# Altium PCB My_MucLeo_EXT_Board.PcbDoc
Units mil, origin at the board's own origin, x right, y up, seen from the top; angles counter-clockwise.
Board outline 5957.48 x 3757.48 mil, 2 copper layers (Top Layer, Bottom Layer); 18 components, 31 nets, 160 pads, 43 vias.
Unrouted connection lines stored in the file: 9.
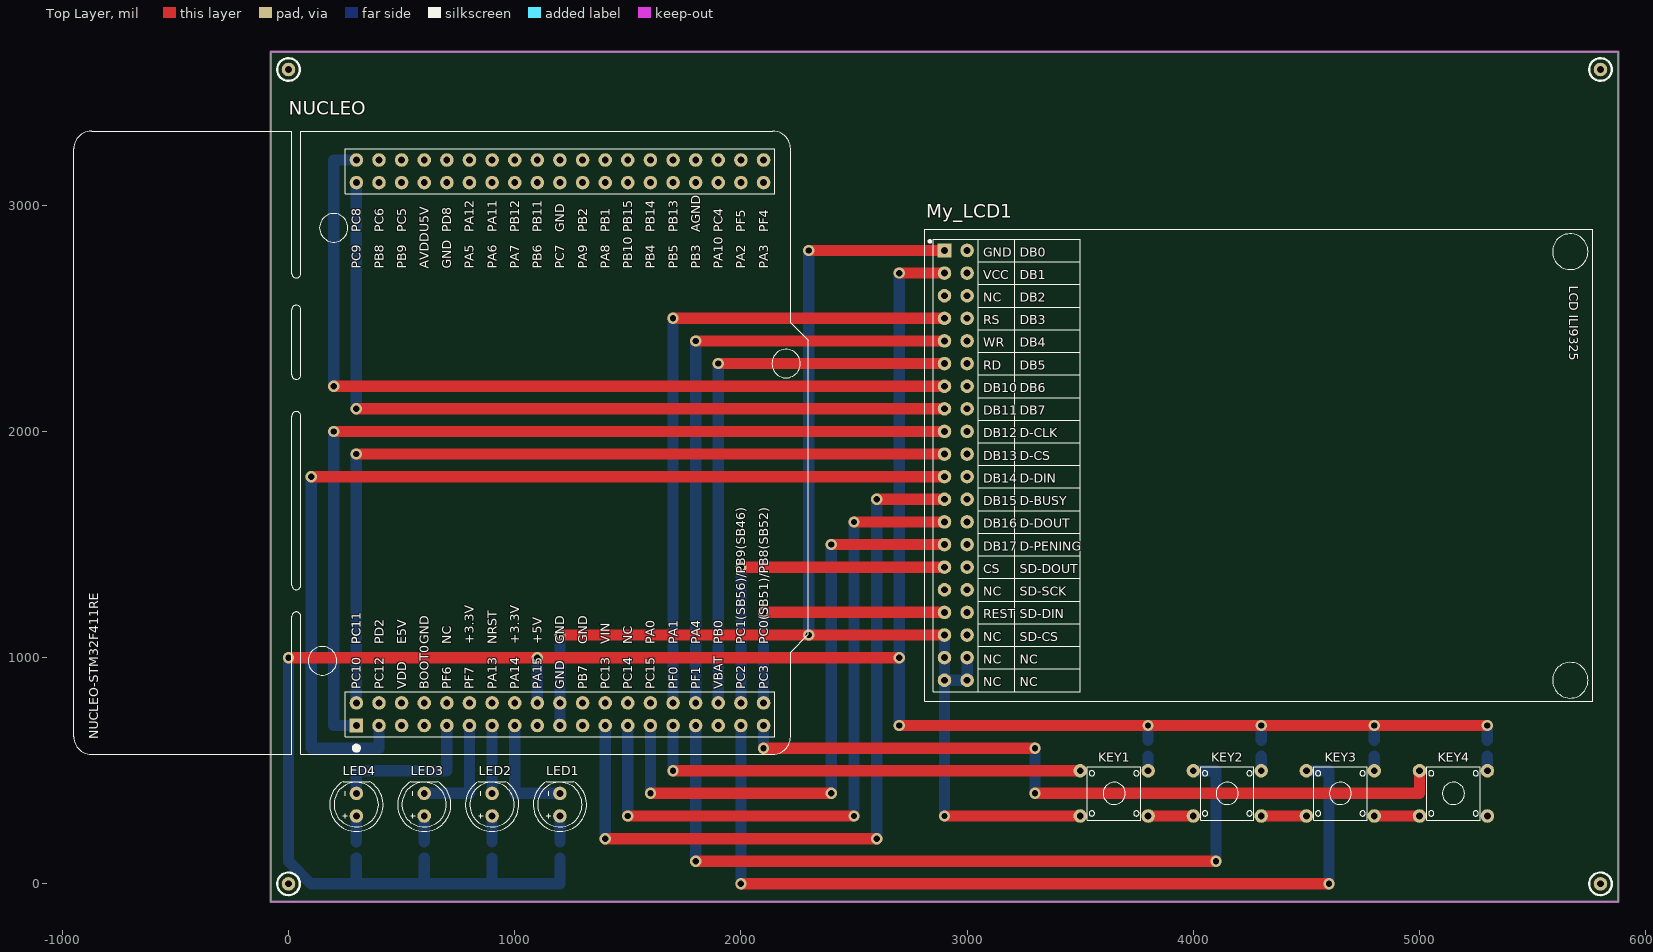
[diagram p0: Top Layer view]
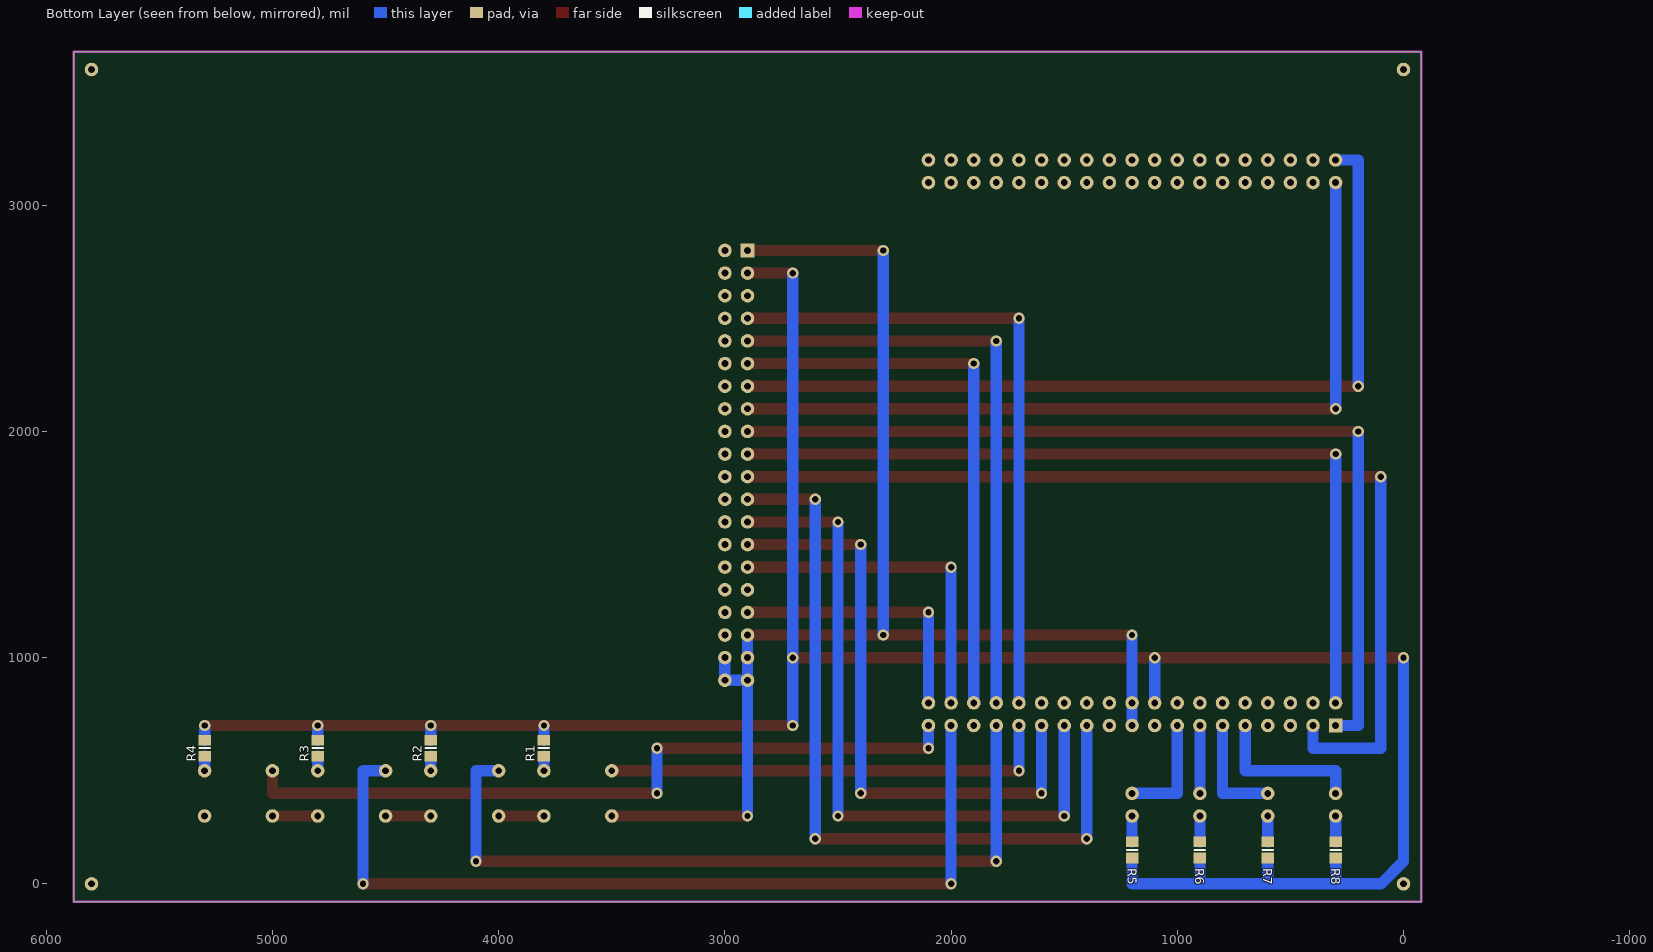
[diagram p1: Bottom Layer view, seen from below]

## Layer stack, top to bottom
Top Layer: signal copper 1.4
Dielectric: dielectric 12.6, FR-4, Dk 4.8
Bottom Layer: signal copper 1.4

## Board outline
-78.74,-78.74 5878.74,-78.74 5878.74,3678.74 -78.74,3678.74

## Design rules (kind name [scope] priority, off if disabled: settings)
Clearance [All] p1: gap=10
PolygonConnect [All] p1: connectstyle=Relief reliefconductorwidth=10 reliefentries=4 polygonreliefangle="90 Angle" airgapwidth=10
RoutingVias [All] p1: holewidth=28 width=50 viastyle="Through Hole" minholewidth=28 minwidth=50 maxholewidth=28 maxwidth=50
SilkToSilkClearance [All] p1 off: silktosilkclearance=10
SilkToSolderMaskClearance [IsPad] p1 off: minsilkscreentomaskgap=10 clearancetoexposedcopper=TRUE
SolderMaskExpansion [All] p1: expansion=4
Width [All] p1: maxlimit=100 minlimit=50 preferedwidth=50 minimp=50.000000 maximp=50.000000 favimp=50.000000
26 further rules are at their usual default settings.

## Components (designator, comment, footprint, x,y, rotation, side; value= is the part's Value field where it differs from the comment)
KEY1 "Button" My_Button 3650,400 r0 top
KEY2 "Button" My_Button 4150,400 r0 top
KEY3 "Button" My_Button 4650,400 r0 top
KEY4 "Button" My_Button 5150,400 r0 top
LED1 "LED" LED-F5 1200,300 r90 top
LED2 "LED" LED-F5 900,300 r90 top
LED3 "LED" LED-F5 600,300 r90 top
LED4 "LED" LED-F5 300,300 r90 top
My_LCD1 "LCD_ILI9325" ILI9325 2900,2800 r270 top
NUCLEO "STM32F411RE" "NUCLEO Board" 2100,700 r90 top
R1 "Res1" 6-0805_N 3800,600 r270 bottom
R2 "Res1" 6-0805_N 4300,600 r270 bottom
R3 "Res1" 6-0805_N 4800,600 r270 bottom
R4 "Res1" 6-0805_N 5300,600 r270 bottom
R5 "Res1" 6-0805_N 1200,150 r90 bottom
R6 "Res1" 6-0805_N 900,150 r90 bottom
R7 "Res1" 6-0805_N 600,150 r90 bottom
R8 "Res1" 6-0805_N 300,150 r90 bottom

## Footprints (in the part's own frame and the unit in brackets; to place one, negate y for a bottom-side part, rotate by r counter-clockwise, add the part's x,y. Pads: shape width x height; smd on the part's side, far side on the other; paste and mask are expansions set on the pad)
6-0805_N [mm] "Chip Resistor, Body 2.0x1.2mm, IPC Medium Density"
  rect 1.2x1.4 smd: 1(-0.9,0) 2(0.9,0)
  silkscreen extent 0,-0.6 0,0.6, body extent -1.07,-0.7 1.07,0.7, height 0.7
ILI9325 [mil] "My  ILI9325 LCD module"
  rect 60x60 hole 30: 1(0,0)
  round 60 hole 30: 2(100,0) 3(200,0) 4(300,0) 5(400,0) 6(500,0) 7(600,0) 8(700,0) 9(800,0) 10(900,0) 11(1000,0) 12(1100,0) 13(1200,0) 14(1300,0) 15(1400,0) 16(1500,0) 17(1600,0) 18(1700,0) 19(1800,0) 20(1900,0) 21(0,100) 22(100,100) 23(200,100) 24(300,100) 25(400,100) 26(500,100) 27(600,100) 28(700,100) 29(800,100) 30(900,100) 31(1000,100) 32(1100,100) 33(1200,100) 34(1300,100) 35(1400,100) 36(1500,100) 37(1600,100) 38(1700,100) 39(1800,100) 40(1900,100)
  silkscreen extent -93,-88 1993,2865
LED-F5 [mil] "LED F5 草帽灯"
  round 60 hole 30: 1(0,0) 2(100,0)
  silkscreen extent -68,-118 152,118
My_Button [mil] "My Botton 4 pins"
  round 60 hole 30: 1(-150,100) 2(150,100) 3(-150,-100) 4(150,-100)
  silkscreen extent -118,-118 118,118
"NUCLEO Board" [mil] "My_Nucleo"
  rect 60x60 hole 30: 1(0,1800)
  round 60 hole 30: 2(100,1800) 3(0,1700) 4(100,1700) 5(0,1600) 6(100,1600) 7(0,1500) 8(100,1500) 9(0,1400) 10(100,1400) 11(0,1300) 12(100,1300) 13(0,1200) 14(100,1200) 15(0,1100) 16(100,1100) 17(0,1000) 18(100,1000) 19(0,900) 20(100,900) 21(0,800) 22(100,800) 23(0,700) 24(100,700) 25(0,600) 26(100,600) 27(0,500) 28(100,500) 29(0,400) 30(100,400) 31(0,300) 32(100,300) 33(0,200) 34(100,200) 35(0,100) 36(100,100) 37(0,0) 38(100,0) 39(2400,1800) 40(2500,1800) 41(2400,1700) 42(2500,1700) 43(2400,1600) 44(2500,1600) 45(2400,1500) 46(2500,1500) 47(2400,1400) 48(2500,1400) 49(2400,1300) 50(2500,1300) 51(2400,1200) 52(2500,1200) 53(2400,1100) 54(2500,1100) 55(2400,1000) 56(2500,1000) 57(2400,900) 58(2500,900) 59(2400,800) 60(2500,800) 61(2400,700) 62(2500,700) 63(2400,600) 64(2500,600) 65(2400,500) 66(2500,500) 67(2400,400) 68(2500,400) 69(2400,300) 70(2500,300) 71(2400,200) 72(2500,200) 73(2400,100) 74(2500,100) 75(2400,0) 76(2500,0)
  silkscreen extent -128,-198 2628,3050

## Part data
KEY1 KEY2 KEY3 KEY4: library part My_Button, "My Button"
LED1 LED2 LED3 LED4: "My LED"
NUCLEO: library part NUCLEO, "STM32F411RE Nucleo Board"
R1 R2 R3 R4 R5 R6 R7 R8: "Resistor"

## Free pads (board coordinates)
  round 60 hole 30: 1(0,3600) 2(0,0) 3(5800,0) 4(5800,3600)

## Via types
v1: diameter 50, hole 28, Top Layer to Bottom Layer, 43 vias

## Nets (pads, with @x,y where several pads share a name; then routed paths per layer and width w, separated by ;. In a path a pad name is that pad's centre, name@x,y a point inside that pad or via, vN(x,y) a via of type N, cw(c..) or ccw(c..) an arc to the next point about the centre after c; other vN are vias at no path point)
CS: My_LCD1.15 NUCLEO.36 | length 1500
  Top Layer w50: v1(2000,1400) My_LCD1.15
  Bottom Layer w50: NUCLEO.36 v1(2000,1400)
DB0: My_LCD1.7 NUCLEO.40 | length 3800
  Top Layer w50: v1(200,2200) My_LCD1.7
  Bottom Layer w50: v1(200,2200) 200,3200 NUCLEO.40
DB1: My_LCD1.8 NUCLEO.39 | length 3600
  Top Layer w50: v1(300,2100) v1(2900,2100)
  Bottom Layer w50: v1(300,2100) 300,2200 NUCLEO.39
DB2: My_LCD1.9 NUCLEO.1 | length 4100
  Top Layer w50: v1(200,2000) My_LCD1.9
  Bottom Layer w50: v1(200,2000) 200,700 NUCLEO.1
DB3: My_LCD1.10 NUCLEO.2 | length 3700
  Top Layer w50: v1(300,1900) My_LCD1.10
  Bottom Layer w50: NUCLEO.2 v1(300,1900)
DB4: My_LCD1.11 NUCLEO.3 | length 4400
  Top Layer w50: v1(100,1800) My_LCD1.11
  Bottom Layer w50: v1(100,1800) 100,600 400,600 NUCLEO.3
DB5: My_LCD1.12 NUCLEO.23 | length 3500
  Top Layer w50: v1(1400,200) v1(2600,200) ; v1(2600,1700) My_LCD1.12
  Bottom Layer w50: v1(1400,200) NUCLEO.23 ; v1(2600,200) v1(2600,1700)
DB6: My_LCD1.13 NUCLEO.25 | length 3100
  Top Layer w50: v1(1500,300) 2100,300 v1(2500,300) ; v1(2500,1600) My_LCD1.13
  Bottom Layer w50: v1(1500,300) NUCLEO.25 ; v1(2500,300) v1(2500,1600)
DB7: My_LCD1.14 NUCLEO.27 | length 2700
  Top Layer w50: v1(1600,400) v1(2400,400) ; v1(2400,1500) My_LCD1.14
  Bottom Layer w50: v1(1600,400) NUCLEO.27 ; v1(2400,400) v1(2400,1500)
GND: KEY1.3 KEY1.4 KEY2.3 KEY2.4 KEY3.3 KEY3.4 KEY4.3 KEY4.4 My_LCD1.1 My_LCD1.3 My_LCD1.16 My_LCD1.18 My_LCD1.19 My_LCD1.20 My_LCD1.39 My_LCD1.40 NUCLEO.19 NUCLEO.20 NUCLEO.47 NUCLEO.58 NUCLEO.70 | length 6600
  Top Layer w50: v1(1200,1100) v1(2300,1100) v1(2900,1100) ; v1(2300,2800) My_LCD1.1 ; v1(2900,300) KEY1.3 ; KEY1.4 KEY2.3 ; KEY2.4 KEY3.3 ; v1(4800,300) KEY4.3
  Bottom Layer w50: NUCLEO.19 NUCLEO.20 v1(1200,1100) ; v1(2300,1100) v1(2300,2800) ; v1(2900,300) My_LCD1.20 ; v1(2900,1100) My_LCD1.19 My_LCD1.20 ; My_LCD1.39 My_LCD1.40 My_LCD1.20
KEY1: KEY1.1 NUCLEO.29 | length 2000
  Top Layer w50: v1(1700,500) KEY1.1
  Bottom Layer w50: v1(1700,500) NUCLEO.29
KEY2: KEY2.1 NUCLEO.31 | length 3400
  Top Layer w50: v1(1800,100) v1(4100,100)
  Bottom Layer w50: v1(1800,100) NUCLEO.31 ; KEY2.1 4100,500 v1(4100,100)
KEY3: KEY3.1 NUCLEO.35 | length 3900
  Top Layer w50: v1(2000,0) v1(4600,0)
  Bottom Layer w50: v1(2000,0) NUCLEO.35 ; KEY3.1 4600,500 v1(4600,0)
KEY4: KEY4.1 NUCLEO.37 | length 3300
  Top Layer w50: v1(2100,600) v1(3300,600) ; v1(3300,400) 5000,400 KEY4.1
  Bottom Layer w50: v1(2100,600) NUCLEO.37 ; v1(3300,400) v1(3300,600)
LED1: LED1.2 NUCLEO.15 | length 500
  Bottom Layer w50: NUCLEO.15 1000,400 LED1.2
LED2: LED2.2 NUCLEO.13 | length 300
  Bottom Layer w50: LED2.2 NUCLEO.13
LED3: LED3.2 NUCLEO.11 | length 500
  Bottom Layer w50: LED3.2 800,400 NUCLEO.11
LED4: LED4.2 NUCLEO.9 | length 700
  Bottom Layer w50: LED4.2 300,500 700,500 NUCLEO.9
NetKEY1_2: KEY1.2 R1.2 | length 64.6
  Bottom Layer w50: KEY1.2 R1.2
NetKEY2_2: KEY2.2 R2.2 | length 64.6
  Bottom Layer w50: KEY2.2 R2.2
NetKEY3_2: KEY3.2 R3.2 | length 64.6
  Bottom Layer w50: KEY3.2 R3.2
NetKEY4_2: KEY4.2 R4.2 | length 64.6
  Bottom Layer w50: KEY4.2 R4.2
NetLED1_1: LED1.1 R5.2 | length 114.6
  Bottom Layer w50: R5.2 LED1.1
NetLED2_1: LED2.1 R6.2 | length 114.6
  Bottom Layer w50: R6.2 LED2.1
NetLED3_1: LED3.1 R7.2 | length 114.6
  Bottom Layer w50: R7.2 LED3.1
NetLED4_1: LED4.1 R8.2 | length 114.6
  Bottom Layer w50: R8.2 LED4.1
NRST: My_LCD1.17 NUCLEO.38 | length 1200
  Top Layer w50: v1(2100,1200) My_LCD1.17
  Bottom Layer w50: NUCLEO.38 v1(2100,1200)
RD: My_LCD1.6 NUCLEO.34 | length 2500
  Top Layer w50: v1(1900,2300) My_LCD1.6
  Bottom Layer w50: NUCLEO.34 v1(1900,2300)
RS: My_LCD1.4 NUCLEO.30 | length 2900
  Top Layer w50: v1(1700,2500) My_LCD1.4
  Bottom Layer w50: NUCLEO.30 v1(1700,2500)
VCC: My_LCD1.2 NUCLEO.18 R1.1 R2.1 R3.1 R4.1 R5.1 R6.1 R7.1 R8.1 | length 10562.1
  Top Layer w50: v1(0,1000) v1(1100,1000) v1(2700,1000) ; v1(2700,700) v1(3800,700) v1(4300,700) v1(4800,700) v1(5300,700) ; v1(2700,2700) My_LCD1.2
  Bottom Layer w50: v1(0,1000) 0,100 100,0 300,0 ; R8.1 300,0 ; R7.1 600,10 590,0 ; R6.1 900,0 ; NUCLEO.18 v1(1100,1000) ; R5.1 1200,0 1100,0 900,0 ; v1(2700,700) v1(2700,1000) v1(2700,2700) ; R1.1 v1(3800,700) ; R2.1 v1(4300,700) ; R3.1 v1(4800,700) ; R4.1 v1(5300,700) ; 300,0 590,0 ; 590,0 900,0
WR: My_LCD1.5 NUCLEO.32 | length 2700
  Top Layer w50: v1(1800,2400) My_LCD1.5
  Bottom Layer w50: NUCLEO.32 v1(1800,2400)
pads on no net: My_LCD1.21 My_LCD1.22 My_LCD1.23 My_LCD1.24 My_LCD1.25 My_LCD1.26 My_LCD1.27 My_LCD1.28 My_LCD1.29 My_LCD1.30 My_LCD1.31 My_LCD1.32 My_LCD1.33 My_LCD1.34 My_LCD1.35 My_LCD1.36 My_LCD1.37 My_LCD1.38 NUCLEO.4 NUCLEO.5 NUCLEO.6 NUCLEO.7 NUCLEO.8 NUCLEO.10 NUCLEO.12 NUCLEO.14 NUCLEO.16 NUCLEO.17 NUCLEO.21 NUCLEO.22 NUCLEO.24 NUCLEO.26 NUCLEO.28 NUCLEO.33 NUCLEO.41 NUCLEO.42 NUCLEO.43 NUCLEO.44 NUCLEO.45 NUCLEO.46 NUCLEO.48 NUCLEO.49 NUCLEO.50 NUCLEO.51 NUCLEO.52 NUCLEO.53 NUCLEO.54 NUCLEO.55 NUCLEO.56 NUCLEO.57 NUCLEO.59 NUCLEO.60 NUCLEO.61 NUCLEO.62 NUCLEO.63 NUCLEO.64 NUCLEO.65 NUCLEO.66 NUCLEO.67 NUCLEO.68 NUCLEO.69 NUCLEO.71 NUCLEO.72 NUCLEO.73 NUCLEO.74 NUCLEO.75 NUCLEO.76

## Keep-outs
Keep-Out Layer:
  the board outline again, w10

## Silkscreen, mask and mechanical layers (free items; w line width, h text height)
Top Overlay:
  circle w10: c0,3600 r50
  circle w10: c5800,3600 r50
  circle w10: c5800,0 r50
  circle w10: c0,0 r50
Top Paste:
  drawing of 2485 lines, arcs and shapes, not listed

## Text inside footprints (layer, text, board x,y; h text height)
My_LCD1: Top Overlay "DB0" at 3232.2,2773.31 h40; Top Overlay "DB1" at 3232.2,2673.31 h40; Top Overlay "DB2" at 3232.2,2573.31 h40; Top Overlay "DB3" at 3232.2,2473.31 h40; Top Overlay "DB4" at 3232.2,2373.31 h40; Top Overlay "DB5" at 3232.2,2273.31 h40; Top Overlay "DB6" at 3232.2,2173.31 h40; Top Overlay "DB7" at 3232.2,2073.31 h40; Top Overlay "D-CLK" at 3232.2,1973.31 h40; Top Overlay "D-CS" at 3232.2,1873.31 h40; Top Overlay "D-DIN" at 3232.2,1773.31 h40; Top Overlay "D-BUSY" at 3232.2,1673.31 h40; Top Overlay "D-DOUT" at 3232.2,1573.31 h40; Top Overlay "D-PENING" at 3232.2,1473.31 h40; Top Overlay "SD-DOUT" at 3232.2,1373.31 h40; Top Overlay "SD-SCK" at 3232.2,1273.31 h40; Top Overlay "NC" at 3232.2,873.31 h40; Top Overlay "NC" at 3232.2,973.31 h40; Top Overlay "SD-CS" at 3232.2,1073.31 h40; Top Overlay "SD-DIN" at 3232.2,1173.31 h40; Top Overlay "NC" at 3072.2,873.31 h40; Top Overlay "NC" at 3072.2,973.31 h40; Top Overlay "NC" at 3072.2,1073.31 h40; Top Overlay "REST" at 3072.2,1173.31 h40; Top Overlay "NC" at 3072.2,1273.31 h40; Top Overlay "CS" at 3072.2,1373.31 h40; Top Overlay "DB17" at 3072.2,1473.31 h40; Top Overlay "DB16" at 3072.2,1573.31 h40; Top Overlay "DB15" at 3072.2,1673.31 h40; Top Overlay "DB14" at 3072.2,1773.31 h40; Top Overlay "DB13" at 3072.2,1873.31 h40; Top Overlay "DB12" at 3072.2,1973.31 h40; Top Overlay "DB11" at 3072.2,2073.31 h40; Top Overlay "DB10" at 3072.2,2173.31 h40; Top Overlay "RD" at 3072.2,2273.31 h40; Top Overlay "WR" at 3072.2,2373.31 h40; Top Overlay "RS" at 3072.2,2473.31 h40; Top Overlay "NC" at 3072.2,2573.31 h40; Top Overlay "VCC" at 3072.2,2673.31 h40; Top Overlay "GND" at 3072.2,2773.31 h40; Top Overlay "LCD ILI9325" at 5662.2,2643.31 h40 r270
NUCLEO: Top Overlay "PF4" at 2120,2880 h40 r90; Top Overlay "PF5" at 2020,2880 h40 r90; Top Overlay "PC4" at 1920,2880 h40 r90; Top Overlay "AGND" at 1820,2880 h40 r90; Top Overlay "PB13" at 1720,2880 h40 r90; Top Overlay "PB14" at 1620,2880 h40 r90; Top Overlay "PB15" at 1520,2880 h40 r90; Top Overlay "PA3" at 2120,2720 h40 r90; Top Overlay "PA2" at 2020,2720 h40 r90; Top Overlay "PA10" at 1920,2720 h40 r90; Top Overlay "PB3" at 1820,2720 h40 r90; Top Overlay "PB5" at 1720,2720 h40 r90; Top Overlay "PB4" at 1620,2720 h40 r90; Top Overlay "PB10" at 1520,2720 h40 r90; Top Overlay "PB1" at 1420,2880 h40 r90; Top Overlay "PB2" at 1320,2880 h40 r90; Top Overlay "GND" at 1220,2880 h40 r90; Top Overlay "PB11" at 1120,2880 h40 r90; Top Overlay "PA8" at 1420,2720 h40 r90; Top Overlay "PA9" at 1320,2720 h40 r90; Top Overlay "PC7" at 1220,2720 h40 r90; Top Overlay "PB6" at 1120,2720 h40 r90; Top Overlay "PB12" at 1020,2880 h40 r90; Top Overlay "PA11" at 920,2880 h40 r90; Top Overlay "PA12" at 820,2880 h40 r90; Top Overlay "PA7" at 1020,2720 h40 r90; Top Overlay "PA6" at 920,2720 h40 r90; Top Overlay "PA5" at 820,2720 h40 r90; Top Overlay "PD8" at 720,2880 h40 r90; Top Overlay "GND" at 720,2720 h40 r90; Top Overlay "U5V" at 620,2880 h40 r90; Top Overlay "AVDD" at 620,2720 h40 r90; Top Overlay "PC5" at 520,2880 h40 r90; Top Overlay "PB9" at 520,2720 h40 r90; Top Overlay "PC6" at 420,2880 h40 r90; Top Overlay "PB8" at 420,2720 h40 r90; Top Overlay "PC9" at 320,2720 h40 r90; Top Overlay "PC8" at 320,2880 h40 r90; Top Overlay "PC0(SB51)/PB8(SB52)" at 2120,1060 h40 r90; Top Overlay "PC1(SB56)/PB9(SB46)" at 2020,1060 h40 r90; Top Overlay "PB0" at 1920,1060 h40 r90; Top Overlay "PA4" at 1820,1060 h40 r90; Top Overlay "PA1" at 1720,1060 h40 r90; Top Overlay "PA0" at 1620,1060 h40 r90; Top Overlay "NC" at 1520,1060 h40 r90; Top Overlay "VIN" at 1420,1060 h40 r90; Top Overlay "GND" at 1320,1060 h40 r90; Top Overlay "GND" at 1220,1060 h40 r90; Top Overlay "+5V" at 1120,1060 h40 r90; Top Overlay "+3.3V" at 1020,1060 h40 r90; Top Overlay "NRST" at 920,1060 h40 r90; Top Overlay "+3.3V" at 820,1060 h40 r90; Top Overlay "NC" at 720,1060 h40 r90; Top Overlay "PC11" at 320,1060 h40 r90; Top Overlay "PC1" at 320,1060 h40 r90; Top Overlay "PD2" at 420,1060 h40 r90; Top Overlay "E5V" at 520,1060 h40 r90; Top Overlay "GND" at 620,1060 h40 r90; Top Overlay "PC3" at 2120,860 h40 r90; Top Overlay "PC2" at 2020,860 h40 r90; Top Overlay "VBAT" at 1920,860 h40 r90; Top Overlay "PF1" at 1820,860 h40 r90; Top Overlay "PF0" at 1720,860 h40 r90; Top Overlay "PC15" at 1620,860 h40 r90; Top Overlay "PC14" at 1520,860 h40 r90; Top Overlay "PC13" at 1420,860 h40 r90; Top Overlay "PB7" at 1320,860 h40 r90; Top Overlay "GND" at 1220,860 h40 r90; Top Overlay "PA15" at 1120,860 h40 r90; Top Overlay "PA14" at 1020,860 h40 r90; Top Overlay "PA13" at 920,860 h40 r90; Top Overlay "PF7" at 820,860 h40 r90; Top Overlay "PF6" at 720,860 h40 r90; Top Overlay "BOOT0" at 620,860 h40 r90; Top Overlay "VDD" at 520,860 h40 r90; Top Overlay "PC12" at 420,860 h40 r90; Top Overlay "PC10" at 320,860 h40 r90; Top Overlay "NUCLEO-STM32F411RE" at -840,640 h40 r90